# Altium PCB H0AR3.PcbDoc (part 2 of 2)
Units mil, origin at the board's own origin, x right, y up, seen from the top; angles counter-clockwise.
Board outline 1363.78 x 1181.1 mil, 2 copper layers (Top Layer, Bottom Layer); 43 components, 26 nets, 123 pads, 39 vias.
Unrouted connection lines stored in the file: 1.
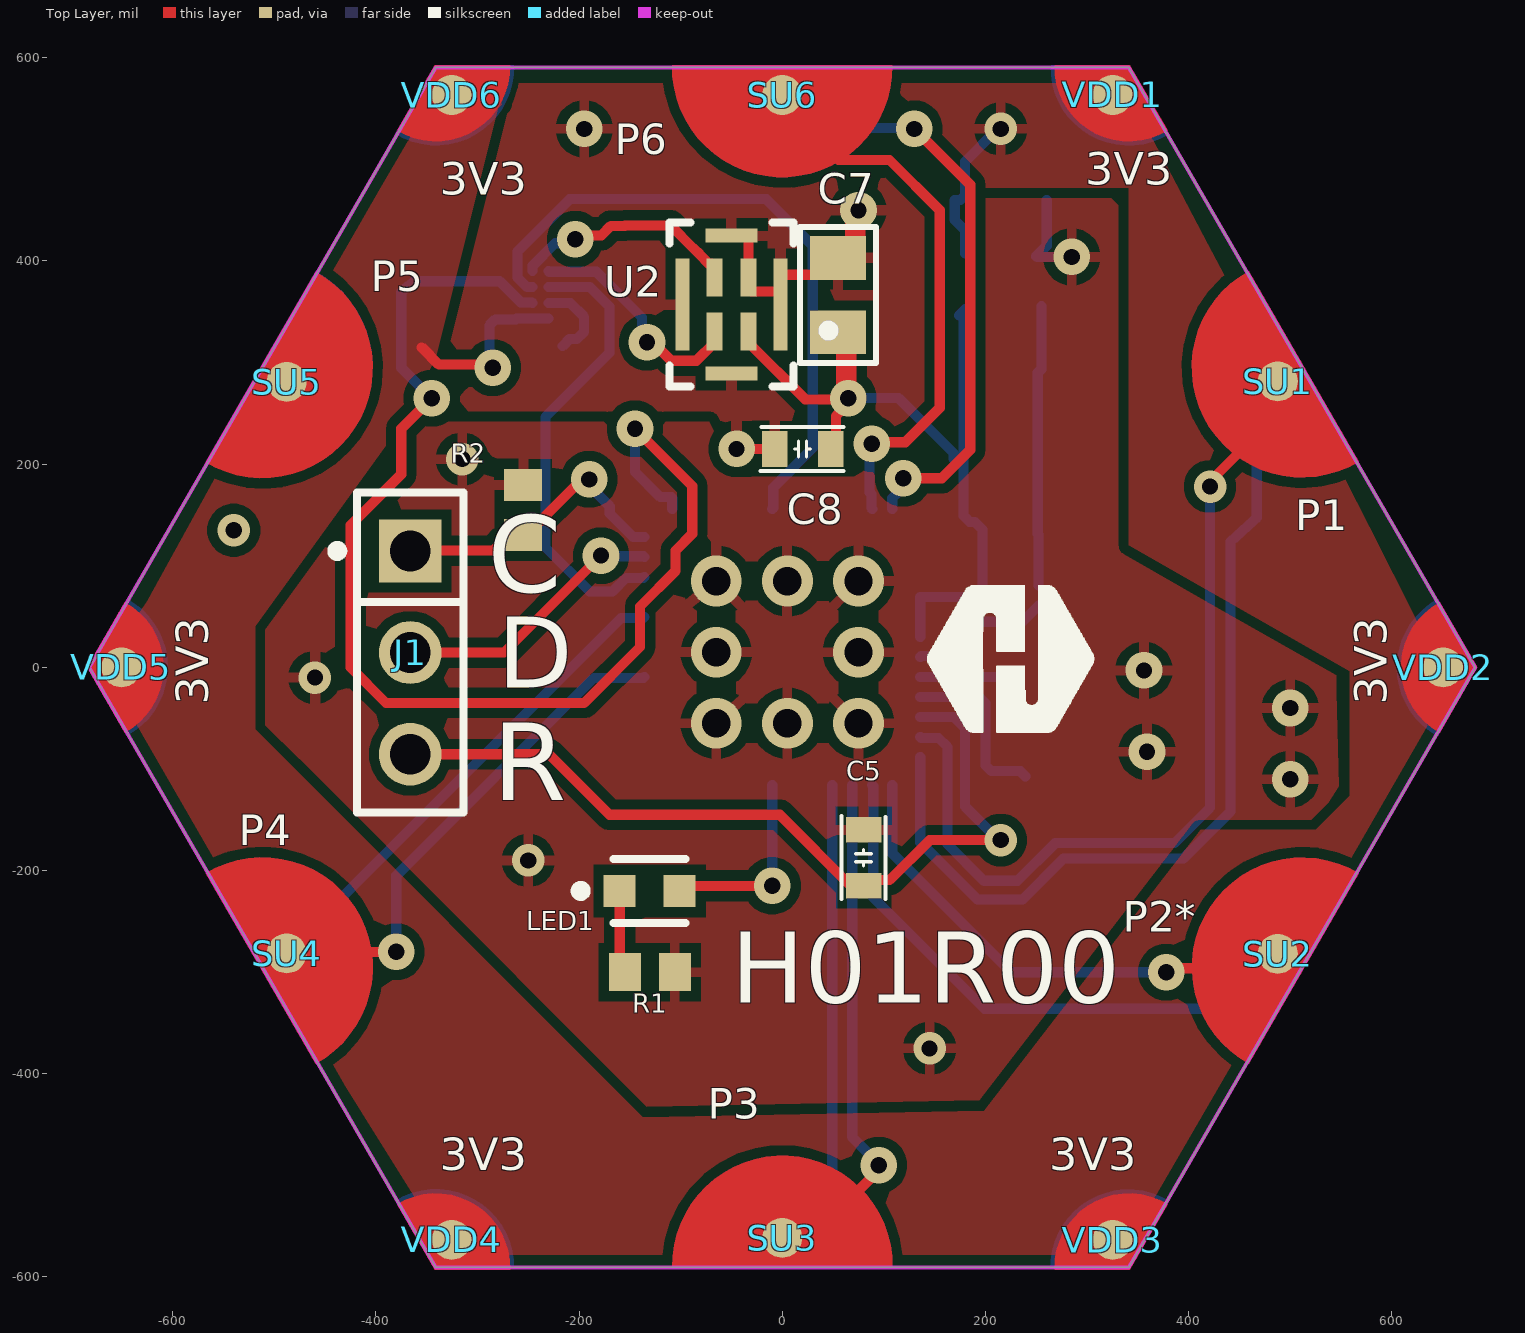
[diagram p0: Top Layer view]

## Via types
v1: diameter 36, hole 16, Top Layer to Bottom Layer, 23 vias
v2: diameter 32, hole 16, Top Layer to Bottom Layer, 8 vias
v3: diameter 50, hole 28, Top Layer to Bottom Layer, 8 vias

## Nets (pads, with @x,y where several pads share a name; then routed paths per layer and width w, separated by ;. In a path a pad name is that pad's centre, name@x,y a point inside that pad or via, vN(x,y) a via of type N, cw(c..) or ccw(c..) an arc to the next point about the centre after c; other vN are vias at no path point) (continued)
GND: (continued)
  other v2: 145,-375 -250,-190 -460,-10 -540,135 -315,205
  other v3: -65,-55 5,-55 75,-55 -65,15 75,15 -65,85 5,85 75,85
LRCK: U1.37 U3.C2 | length 1239.6
  Top Layer w10: v1(-345,265) -375,235 -375,190 -425,140 -425,0 -390,-35 -195,-35 -140,20 -140,60 -105,95 -105,115 -88.58,131.42 -88.58,178.58 v1(-145,235)
  Bottom Layer w10: v1(-345,265) -372.07,292.07 -375,295 -375,369.27 -371.64,372.63 -362.22,380 -278.17,380 -275.25,377.07 -257.43,359.25 -246.5,359.25 U3.C2 ; v1(-145,235) -145,192.56 -120,167.56 -109.17,167.56 -108.27,166.65 U1.37
NetLED1_1: LED1.1 R1.2 | length 82.1
  Top Layer w10: LED1.1 -160,-295 R1.2
NetLED1_2: LED1.2 U1.19 | length 192.3
  Top Layer w10: LED1.2 -95.94,-215 v1(-10,-215)
  Bottom Layer w10: v1(-10,-215) -9.92,-214.92 -9.92,-115.91 U1.19
NetU1_8: U1.8 X1.P$3 | length 79.2
  Bottom Layer w10: U1.8 X1.P$3@215,-9.53
NetU1_9: U1.9 X1.P$1 | length 171.5
  Bottom Layer w10: U1.9 194.14,-29.21 200,-35.07 200,-96.27 205.86,-102.13 234.21,-102.13 X1.P$1@239.21,-107.13
NetU2_4: U2.4 U3.A1 | length 229.4
  Top Layer w10: v1(-133.12,320) -127.45,320 -109.26,301.81 -84.61,301.81 -66.73,319.68 U2.4
  Bottom Layer w10: U3.A1 -229.35,389.35 -183.14,389.35 -138.09,344.31 -138.09,324.97 v1(-133.12,320)
NRST: C5.2 J1.3 U1.10 | length 819
  Top Layer w10: J1.3 -229.58,-85.42 -170,-145 -2.56,-145 C5.2@70,-217.56 ; C5.2 85.67,-209.33 105.67,-209.33 145,-170 v2(215,-170)
  Bottom Layer w10: U1.10 168.9,-48.9 180,-60 180,-137 213,-170 v2(215,-170)
Sample_Rate: U2.3 U3.A2 | length 228.3
  Top Layer w10: v1(-203.71,421.29) -199.89,425.11 -178.19,425.11 -168.71,434.59 -155,434.59 -154.49,435.1 -110.1,435.1 -87.36,412.36 -87.2,412.36 -81.34,406.5 -81.34,406.34 -72.36,397.36 -69.61,397.36 -66.37,394.12 U2.3@-66.37,384.12
  Bottom Layer w10: U3.A2 -245.75,395.47 -223.75,417.46 -207.54,417.46 v1(-203.71,421.29)
UART1_RX: SD4.UART_D U1.32 | length 430
  Bottom Layer w10: -450,-230 -437.12,-230 -158.5,48.62 -136.73,48.62 U1.32
UART1_TX: SU4.UART_U U1.29 | length 460.1
  Top Layer w10: -440,-280 v1(-380,-280)
  Bottom Layer w10: v1(-380,-280) -380,-205 -185.43,-10.43 -136.73,-10.43 U1.29
UART2_RX: SD2.UART_D U1.14 | length 518.9
  Bottom Layer w10: U1.14 89.49,-116.73 89.49,-226.49 199,-336 429,-336 434.86,-330.14 434.86,-321.86 431,-318 431,-317
UART2_TX: SU2.UART_U U1.13 | length 425.4
  Top Layer w10: v1(377.95,-300) 381.77,-296.17 407.83,-296.17 414,-290
  Bottom Layer w10: U1.13 108.27,-182.86 225.41,-300 v1(377.95,-300)
UART3_RX: SD6.UART_D U1.48 | length 521.4
  Top Layer w10: v1(119,186.09) 156.92,186.09 185,214.18 185,475 v1(130,530)
  Bottom Layer w10: 60,531 129,531 v1(130,530) ; U1.48 108.27,166.65 114.03,172.41 114.03,181.12 v1(119,186.09)
UART3_TX: SU6.UART_U U1.47 | length 488
  Top Layer w10: 37.4,517.6 55.55,499.45 105.55,499.45 155,450 155,255.41 121.16,221.57 89.51,221.57 v1(88.16,220.22)
  Bottom Layer w10: v1(88.16,220.22) 86,218.06 86,172.42 87.68,170.75 87.68,156.73 U1.47
UART4_RX: SD1.UART_D U1.12 | length 891.9
  Bottom Layer w10: U1.12 135.83,-172.04 192.39,-228.61 236.39,-228.61 277,-188 395,-188 441,-142 441,123.81 463.88,144.31 464.07,144.5 467,147.43 467,260.7 SD1.UART_D
UART4_TX: SU1.UART_U U1.11 | length 846.1
  Top Layer w10: v2(421,178) 421,183 488.43,250.43
  Bottom Layer w10: U1.11 136.73,-69.49 153.83,-69.49 162.56,-78.22 162.56,-174.13 198.43,-210 231.57,-210 268.63,-172.94 386.06,-172.94 421,-138 v2(421,178)
UART6_RX: SD3.UART_D U1.16 | length 400.9
  Bottom Layer w10: 45,-515 49.21,-510.79 U1.16
UART6_TX: SU3.UART_U U1.15 | length 453.6
  Top Layer w10: 50,-540 95,-495 v1(95,-490)
  Bottom Layer w10: U1.15 68.9,-462.36 95,-488.46 v1(95,-490)
VDD: C6.2 D1.2 FB1.1 U3.D1 U3.D2 VDD1.Pwr_U VDD2.Pwr_U VDD3.Pwr_U VDD4.Pwr_U VDD5.Pwr_U VDD6.Pwr_U | length 332.8
  Top Layer w10: -355,315 -338,298 -288,298 v1(-285,295)
  Bottom Layer w10: v1(-285,295) -288.26,298.26 -288.26,336.66 -282.4,342.52 -262.4,342.52 -261.42,343.5 U3.D1@-230,343.5 ; FB1.1 180,430 169.72,440.28 D1.2 175.16,460 180,464.84 180,498 212,530 v2(215,530)
VDDA: C1.2 C2.1 C3.2 C4.2 C7.2 C8.2 FB1.2 U1.4 U1.5 U1.6 U2.1 | length 791.9
  Top Layer w10: U2.1 -33.27,319.68 22.59,263.83 v1@63.83,263.83 ; C7.2@44,319 C7.2 ; C8.2 52.93,220.37 52.93,247.52 63.83,258.41 v1@63.83,263.83 ; v1(65,265) v1@63.83,263.83
  Top Layer w20: C7.2@44,319 62.59,319 63.09,318.5 63.09,266.91 v1(65,265)
  Bottom Layer w10: v1(65,265) 114.5,265 168.5,211 C2.1 ; U1.6 U1.5 U1.4 C1.2@193.45,69.21 ; FB1.2@173.78,346.22 FB1.2 ; FB1.2@178.5,346.83 178.5,149.16 184.55,143.11 189.47,143.11 197.07,135.52 C3.2 C1.2
VSSA: C1.1 C2.2 C3.1 C4.1 C7.1 C8.1 R3.2 U1.7 U2.2 U2.5 | length 712.7
  Top Layer w10: U2.5@-50,425 -35.16,425 -33.27,423.11 U2.2 -33.27,372.83 -30.39,369.96 -3.66,369.96 -1.77,368.07 -1.77,357.09 -1.77,384.61 0.12,386.5 38.5,386.5 C7.1 ; v1(-45,215) C8.1
  Top Layer w20: C7.1 60.44,403 71.94,414.5 71.94,446.94 v1(75,450)
  Bottom Layer w10: U1.7 136.73,11.06 157.65,11.06 191.58,45 236.51,45 252.19,60.67 ; C3.1@251.5,131.48 251.5,290 255,293.5 R3.2@255,355.39 ; C1.1 C3.1
  other v1: -195,530
pads on no net: U1.1 U1.2 U1.3 U1.17 U1.18 U1.20 U1.21 U1.22 U1.23 U1.24 U1.25 U1.26 U1.27 U1.28 U1.30 U1.31 U1.33 U1.38 U1.39 U1.40 U1.41 U1.43 U1.44 U1.45 U1.46

## Polygon pours and split planes (outlines as drawn)
VSSA on Bottom Layer "VSSA_L02_P013" (solid, pour order 13): -255,350 -205,350 -205,180 340.94,180 340.94,479 268,585 -255,585
GND on Bottom Layer "GND_L02_P017" (solid, pour order 17): -260,345 -160,345 -160,155 340.94,155 340.94,-355 445,-355 445,-415 405,-470 390,-503.59 325.2,-568.39 -321.75,-568.39 -324.28,-565.86 -650.39,-5 -260,666.41
GND on Bottom Layer "GND_L02_P015" (solid, pour order 15): 241.23,544.12 352.57,544.12 617,62 619,60 651.01,0 485,-298.68 173.67,-298.68
GND on Bottom Layer "GND_L02_P008" (solid, pour order 8): 118.51,53.13 380,53.13 380,-140 118.51,-140
VSSA on Bottom Layer "VSSA_L02_P001" (solid, pour order 1): 265.95,385.56 340.94,385.56 340.94,64 240,64 240,359.62
GND on Top Layer "GND_L01_P016" (solid, pour order 16): -530,-85 -525,-90 -475,-90 -435,-130 -390,-175 -390,-240 -175,-455 327.79,-455 547.94,-116.91 545,-23.65 545,0 332,170.97 332,462.16 145,462.16 145,242 -530,242
VSSA on Top Layer "VSSA_L01_P018" (solid, pour order 18): -260,575 150,575 150,230 15,230 -355,230 -355,480
VDD on Top Layer "VDD_L01_P014" (solid, pour order 14): 419,-435 357.48,-546.37 293.7,-580 -325.2,-580 -400,-460 -540.18,-235.11 -625,-75 -670,0 -625,65 -545,210 -518.88,259.35 -395,472 -335,575 -266.61,563.39 -280,550 -340.94,305 -375.72,238.11 -518.88,40.27 -518.88,-61.12 -137.31,-442.69 198.86,-436.18 411.63,-160 525,-160 558.59,-126.41 558.59,-3.69 531,12 427.87,70.64 340.94,120.07 341,472 117.79,472 82.08,531.58 97.14,575 335,575 382.72,485.01 419,416.6 536.77,187.77 545,187.77 553.6,185.66 565.29,162.64 577.53,138.53 625,45 632,45 632,-39 636,-43 634.5,-44.5 635,-75 611.96,-121.13 590,-160 550,-200 535,-200 535,-225

## Keep-outs
Keep-Out Layer:
  the board outline again, w3.94

## Silkscreen, mask and mechanical layers (free items; w line width, h text height)
Top Overlay:
  drawing of 1337 lines, arcs and shapes, not listed
  text "P6" at -165,505.01 h30
  text "3V3" at 298,475.01 h32
  text "3V3" at -337,465.01 h32
  text "P5" at -405,370.01 h30
  text "P1" at 505,135.01 h30
  text "C" at -290,74.02 h76
  text "D" at -280,-19.99 h70
  text "3V3" at -565.01,-37 h32 r90
  text "3V3" at 594.99,-37 h32 r90
  text "R" at -285,-130.98 h76
  text "P4" at -535,-174.99 h30
  text "P2*" at 335,-259.99 h30
  text "H01R00" at -50,-330 h70
  text "P3" at -73.14,-444.45 h30
  text "3V3" at -337,-494.99 h32
  text "3V3" at 263,-494.99 h32
Bottom Overlay:
  text "P6" at -125,510.01 h30
  text "GND" at 382,475.01 h32
  text "GND" at -273,470.01 h32
  text "P5" at -370,370.01 h30
  text "P1" at 535,135.01 h30
  text "GND" at -575.01,32 h32 r90
  text "GND" at 544.99,-19 h32 r90
  text "P4" at -490,-174.99 h30
  text "P2*" at 380,-259.99 h30
  text "P3" at -35,-449.99 h30
  text "GND" at -337,-465.01 h32 r180
  text "GND" at 263,-465.01 h32 r180
Top Solder:
  drawing of 20 lines, arcs and shapes, not listed
Dimensions:
  the board outline again, w3.94

## Text inside footprints (layer, text, board x,y; h text height)
C2: Mechanical 32 "1" at 158.5,205 h25 r180; Mechanical 32 "2" at 231.5,205 h25 r180; Mechanical 33 "C40" at 278.5,212.17 h25 r180
C4: Mechanical 32 "2" at 178.5,290 h25; Mechanical 32 "1" at 251.5,290 h25; Mechanical 33 "C40" at 131.5,282.83 h25
C7: Mechanical 32 "1" at 55,413 h25 r270; Mechanical 32 "2" at 55,340 h25 r270; Mechanical 33 "C40" at 47.83,293 h25 r270